# Altium PCB Main.PcbDoc
Units mm, origin at the board's own origin, x right, y up, seen from the top; angles counter-clockwise.
Board outline 44.2 x 163.58 mm, 2 copper layers (Top Layer, Bottom Layer); 7 components, 42 nets, 146 pads, 51 vias.
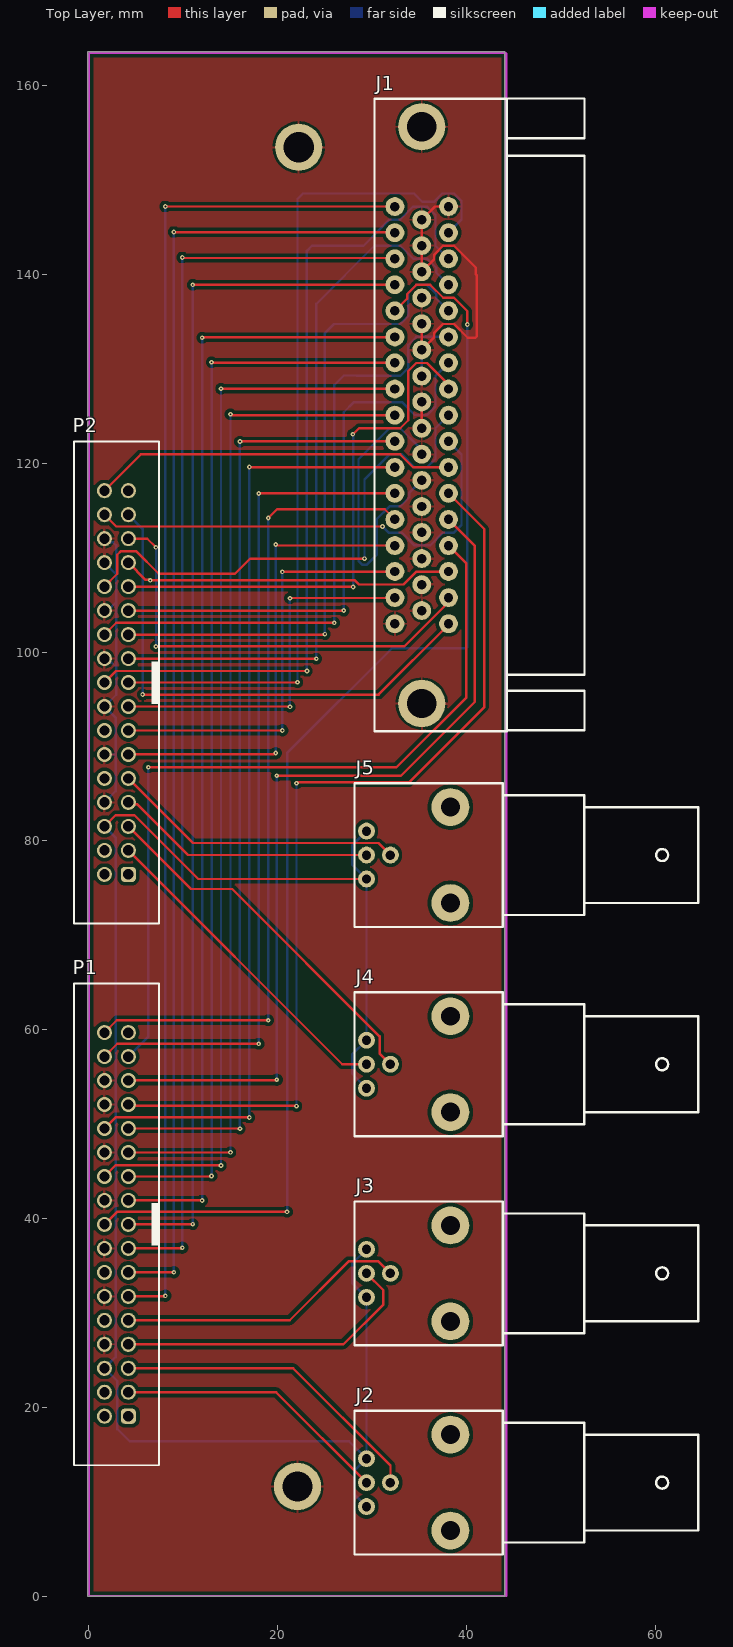
[diagram p0: Top Layer view]
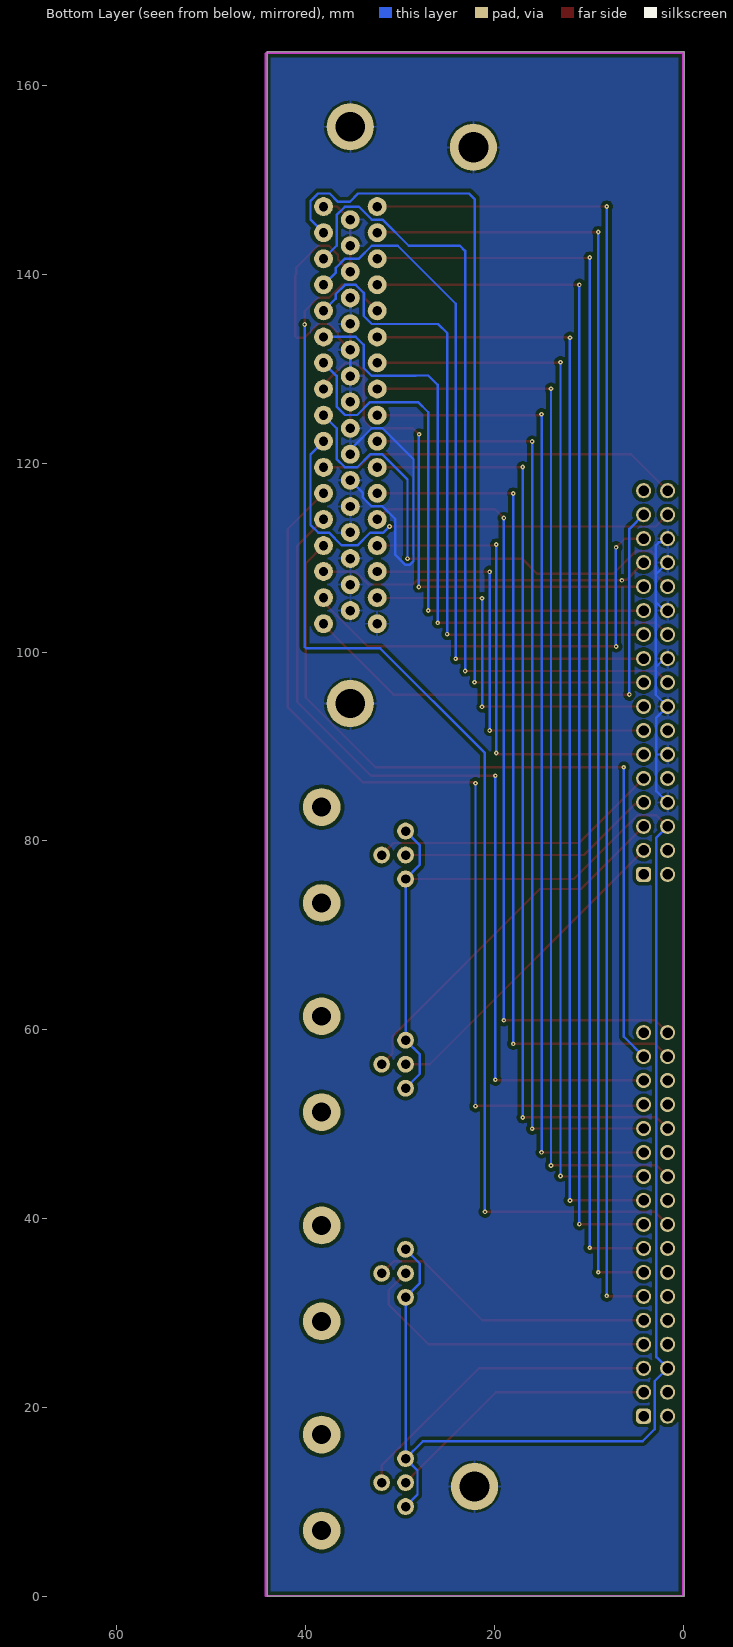
[diagram p1: Bottom Layer view, seen from below]

## Layer stack, top to bottom
Top Solder: solder mask 0.0102, Solder Resist, Dk 3.5
Top Layer: signal copper 0.0356
Dielectric 1: dielectric 0.32, FR-4, Dk 4.8
Bottom Layer: signal copper 0.0356
Bottom Solder: solder mask 0.0102, Solder Resist, Dk 3.5

## Board outline
-0.127,0 44.069,0 44.069,163.576 -0.127,163.576

## Design rules (kind name [scope] priority, off if disabled: settings)
BoardOutlineClearance [not(IsText)] p1 off: gap=0.7 ignorepadtopadclearanceinfootprint=FALSE
Clearance "Polygon Clearance" [InPolygon] p1: gap=0.381 ignorepadtopadclearanceinfootprint=TRUE
Clearance [All] p2: gap=0.254 ignorepadtopadclearanceinfootprint=TRUE except(0: Arc-Hole Track-Hole SMDPad-Hole THPad-Hole Via-Hole Fill-Hole Poly-Hole Region-Hole Text-Hole)
Height [All] p1: minheight=0 maxheight=30.48 prefheight=12.7
PolygonConnect [All] p1: connectstyle=Relief reliefconductorwidth=0.254 reliefentries=4 polygonreliefangle="90 Angle" airgapwidth=0.254
RoutingVias RoutingVias_1 [InNetClass('HC')] p1: holewidth=0.4 width=0.7 viastyle="Through Hole" minholewidth=0.4 minwidth=0.7 maxholewidth=0.4 maxwidth=0.7
RoutingVias [All] p2: holewidth=0.2 width=0.5 viastyle="Through Hole" minholewidth=0.2 minwidth=0.5 maxholewidth=0.4 maxwidth=0.7
SolderMaskExpansion [All] p1: expansion=0.102 istentingtop=FALSE
Width [All] p1: maxlimit=5.08 minlimit=0.254 preferedwidth=0.254 toplayer_maxwidth=2.54 minimp=50.000000 maximp=50.000000 favimp=50.000000
29 further rules are at their usual default settings.

## Components (designator, comment, footprint, x,y, rotation, side; value= is the part's Value field where it differs from the comment)
J1 "163A18649X" "CON D STD 50Way Male RA" 35.26,125.1 r90 top
J2 "CON BNC Dual B" BNC_INS90_Dual 31.95,12.02 r180 top
J3 "CON BNC Dual B" BNC_INS90_Dual 31.95,34.18 r180 top
J4 "CON BNC Dual B" BNC_INS90_Dual 31.95,56.34 r180 top
J5 "CON BNC Dual B" BNC_INS90_Dual 31.95,78.5 r180 top
P1 "61203421621" 61203421621 2.921,39.37 r90 top
P2 "61203421621" 61203421621 2.921,96.774 r90 top

## Footprints (in the part's own frame and the unit in brackets; to place one, negate y for a bottom-side part, rotate by r counter-clockwise, add the part's x,y. Pads: shape width x height; smd on the part's side, far side on the other; paste and mask are expansions set on the pad)
61203421621 [mm] "34 pins, straight, gold plating"
  rrect50% 1.6x1.6 hole 1.1: 1(-20.32,-1.27)
  round 1.6 hole 1.1: 2(-20.32,1.27) 3(-17.78,-1.27) 4(-17.78,1.27) 5(-15.24,-1.27) 6(-15.24,1.27) 7(-12.7,-1.27) 8(-12.7,1.27) 9(-10.16,-1.27) 10(-10.16,1.27) 11(-7.62,-1.27) 12(-7.62,1.27) 13(-5.08,-1.27) 14(-5.08,1.27) 15(-2.54,-1.27) 16(-2.54,1.27) 17(0,-1.27) 18(0,1.27) 19(2.54,-1.27) 20(2.54,1.27) 21(5.08,-1.27) 22(5.08,1.27) 23(7.62,-1.27) 24(7.62,1.27) 25(10.16,-1.27) 26(10.16,1.27) 27(12.7,-1.27) 28(12.7,1.27) 29(15.24,-1.27) 30(15.24,1.27) 31(17.78,-1.27) 32(17.78,1.27) 33(20.32,-1.27) 34(20.32,1.27)
  silkscreen extent -25.52,-4.5 25.52,4.5, body extent -25.42,-4.42 25.42,4.75, height 9.13
BNC_INS90_Dual [mm] "Dual BNC Amphenol 031-6575"
  round 1.778 hole 1: 1(0,0) 2(2.54,2.54) 3(2.54,0) 4(2.54,-2.54)
  round 4 hole 2: ""(-6.35,5.08) ""(-6.35,-5.08)
  silkscreen extent -32.59,-7.62 3.81,7.62
"CON D STD 50Way Male RA" [mm] "50 Way Male D Sub RA PCB"
  round 5 hole 3.1: 0(-30.55,0) 0(30.55,0)
  round 2 hole 1: 1(-22.1,2.84) 2(-19.33,2.84) 3(-16.56,2.84) 4(-13.82,2.84) 5(-11.05,2.84) 6(-8.28,2.84) 7(-5.54,2.84) 8(-2.77,2.84) 9(0,2.84) 10(2.77,2.84) 11(5.54,2.84) 12(8.28,2.84) 13(11.05,2.84) 14(13.82,2.84) 15(16.56,2.84) 16(19.33,2.84) 17(22.1,2.84) 18(-20.7,0) 19(-17.96,0) 20(-15.19,0) 21(-12.42,0) 22(-9.68,0) 23(-6.91,0) 24(-4.14,0) 25(-1.4,0) 26(1.4,0) 27(4.14,0) 28(6.91,0) 29(9.68,0) 30(12.42,0) 31(15.19,0) 32(17.96,0) 33(20.7,0) 34(-22.1,-2.84) 35(-19.33,-2.84) 36(-16.56,-2.84) 37(-13.82,-2.84) 38(-11.05,-2.84) 39(-8.28,-2.84) 40(-5.54,-2.84) 41(-2.77,-2.84) 42(0,-2.84) 43(2.77,-2.84) 44(5.54,-2.84) 45(8.28,-2.84) 46(11.05,-2.84) 47(13.82,-2.84) 48(16.56,-2.84) 49(19.33,-2.84) 50(22.1,-2.84)
  silkscreen extent -33.5,-17.25 33.55,5, body extent -33.5,-17.33 33.5,4.97, height 15.2

## Part data
J1: library part "CON DSUB50 RA Male", "50 Position D-Sub Plug, Male Pins Connector", Digi-Key=626-2184-ND, Manufacturer Part Number=163A18649X, Orientation="Right Angle", Positions=50
J2 J3 J4 J5: "BNC Dual - Black", Manufacturer=Amphenol, Manufacturer Code=031-6575, Digikey Order=ARF2111-ND
P1 P2: library part CMP-1502-00013-2, Color=Black, Contact Resistance=20mΩ, Current Rating=3A, Insulation Resistance=1GΩ, Max Operating Temperature=105°C, Min Operating Temperature=-40°C, Operating Supply Voltage=250V, Connector Type="Male Pin", Contact Material=Copper, Contact Plating=Gold, Gender=Male, Insulation Material=PBT, Lead Free="Lead Free", Lead Pitch=2.54mm, Length=50.84mm, Mount="Through Hole", NexarPartId=32855483, Number of contacts=34, Number of Pins=34, Number of Positions=34, Number Of Rows=2, Orientation=Vertical, Pitch=2.54mm, REACH SVHC=Unknown, RoHS=Compliant, Row Spacing=2.54mm, Termination=Solder

## Free pads (board coordinates)
  round 5 hole 3.2: 1(22.227,153.473) 2(22.1,11.6)

## Via types
v1: diameter 0.5, hole 0.2, Top Layer to Bottom Layer, 51 vias

## Nets (pads, with @x,y where several pads share a name; then routed paths per layer and width w, separated by ;. In a path a pad name is that pad's centre, name@x,y a point inside that pad or via, vN(x,y) a via of type N, cw(c..) or ccw(c..) an arc to the next point about the centre after c; other vN are vias at no path point)
AGND: J2.2 J2.4 J3.2 J3.4 J4.2 J4.4 J5.2 J5.4 P1.6 P2.6 | length 183.4
  Top Layer w0.254: P2.6 2.832,82.715 4.832,82.715 11.587,75.96 J5.2
  Bottom Layer w0.254: P2.6 2.832,80.353 2.832,25.311 P1.6 3.01,22.771 3.01,17.69 4.3,16.4 27.57,16.4 J2.4 ; J2.2 28.14,10.75 28.14,13.29 J2.4 ; J3.4 27.886,35.196 27.886,33.164 J3.2 J2.4 ; J4.2 27.886,55.324 27.886,57.356 J4.4 J5.2 27.886,77.484 27.886,79.516 J5.4
AI1: J2.3 P1.3 | length 29.2
  Top Layer w0.254: P1.3 19.84,21.59 J2.3
AI2: J2.1 P1.5 | length 33.8
  Top Layer w0.254: P1.5 21.636,24.13 31.95,13.816 J2.1
AI3: J3.3 P1.7 | length 32.8
  Top Layer w0.254: P1.7 26.97,26.67 31.2,30.9 31.2,32.39 J3.3
AI4: J3.1 P1.9 | length 30.9
  Top Layer w0.254: P1.9 21.283,29.21 27.523,35.45 30.68,35.45 J3.1
AI5: J4.3 P2.3 | length 34.6
  Top Layer w0.254: P2.3 26.845,56.34 J4.3
AI6: J4.1 P2.5 | length 39.2
  Top Layer w0.254: P2.5 10.825,74.9 15.186,74.9 30.797,59.289 30.797,57.493 J4.1
AI7: J5.3 P2.7 | length 27.5
  Top Layer w0.254: P2.7 4.405,83.86 5.14,83.86 10.5,78.5 J5.3
AI8: J5.1 P2.9 | length 31.1
  Top Layer w0.254: P2.9 11.035,79.77 30.68,79.77 J5.1
DIO1: J1.17 P1.11 | length 143.6
  Top Layer w0.254: P1.11 8.05,31.75 v1(8.1,31.8) ; v1(8.1,147.2) J1.17
  Bottom Layer w0.254: v1(8.1,31.8) v1(8.1,147.2)
DIO2: J1.16 P1.13 | length 138.5
  Top Layer w0.254: P1.13 8.89,34.29 8.9,34.3 v1(9,34.3) ; v1(9,144.5) 9.035,144.465 32.385,144.465 J1.16
  Bottom Layer w0.254: v1(9,34.3) v1(9,144.5)
DIO3: J1.15 P1.15 | length 133.2
  Top Layer w0.254: P1.15 9.83,36.83 v1(9.9,36.9) ; v1(9.9,141.8) 9.947,141.753 32.327,141.753 J1.15
  Bottom Layer w0.254: v1(9.9,36.9) v1(9.9,141.8)
DIO4: J1.14 P1.17 | length 127.7
  Top Layer w0.254: P1.17 10.97,39.37 v1(11,39.4) ; v1(11,138.9) 11.01,138.91 32.41,138.91 J1.14
  Bottom Layer w0.254: v1(11,39.4) v1(11,138.9)
DIO5: J1.13 P1.18 | length 138.1
  Top Layer w0.254: P1.18 2.981,40.7 v1(21,40.7) ; J1.13 33.721,137.451 33.721,137.934 34.688,138.901 36.166,138.901 37.536,137.531 38.672,137.531 40.1,136.103 v1(40.1,134.7)
  Bottom Layer w0.254: v1(21,40.7) 21,89.3 32.1,100.4 39.951,100.4 40.1,100.549 v1(40.1,134.7)
DIO6: J1.12 P1.19 | length 119.7
  Top Layer w0.254: P1.19 11.99,41.91 v1(12,41.9) ; v1(12,133.3) 12.04,133.34 32.38,133.34 J1.12
  Bottom Layer w0.254: v1(12,41.9) v1(12,133.3)
DIO7: J1.11 P1.21 | length 114.5
  Top Layer w0.254: P1.21 12.95,44.45 v1(13,44.5) ; v1(13,130.7) 13.03,130.67 32.39,130.67 J1.11
  Bottom Layer w0.254: v1(13,44.5) v1(13,130.7)
DIO8: J1.10 P1.22 | length 113.6
  Top Layer w0.254: P1.22 2.832,45.631 13.969,45.631 v1(14,45.6) ; v1(14,127.9) 14.015,127.885 32.405,127.885 J1.10
  Bottom Layer w0.254: v1(14,45.6) v1(14,127.9)
DIO9: J1.9 P1.23 | length 106.5
  Top Layer w0.254: P1.23 14.99,46.99 v1(15,47) ; v1(15,125.2) 15.067,125.2 15.167,125.1 J1.9
  Bottom Layer w0.254: v1(15,47) v1(15,125.2)
DIO10: J1.8 P1.25 | length 101.1
  Top Layer w0.254: P1.25 15.97,49.53 v1(16,49.5) ; v1(16,122.3) 16.015,122.315 32.405,122.315 J1.8
  Bottom Layer w0.254: v1(16,49.5) v1(16,122.3)
DIO11: J1.7 P1.26 | length 100.2
  Top Layer w0.254: P1.26 2.832,50.711 16.989,50.711 v1(17,50.7) ; v1(17,119.6) 17.02,119.58 32.4,119.58 J1.7
  Bottom Layer w0.254: v1(17,50.7) v1(17,119.6)
DIO12: J1.6 P1.32 | length 89.6
  Top Layer w0.254: P1.32 3.001,58.5 v1(18,58.5) ; v1(18,116.8) 18.01,116.81 32.41,116.81 J1.6
  Bottom Layer w0.254: v1(18,58.5) v1(18,116.8)
DIO13: J1.5 P1.34 | length 85.3
  Top Layer w0.254: P1.34 2.961,61 v1(19,61) ; v1(19,114.2) 19.931,115.131 31.339,115.131 J1.5
  Bottom Layer w0.254: v1(19,61) v1(19,114.2)
DIO14: J1.4 P2.11 | length 50.4
  Top Layer w0.254: P2.11 4.214,89.177 19.61,89.177 19.733,89.3 v1(19.8,89.3) ; v1(19.8,111.4) 19.867,111.4 19.977,111.29 32.41,111.29 J1.4
  Bottom Layer w0.254: v1(19.8,89.3) v1(19.8,111.4)
DIO15: J1.3 P2.13 | length 45
  Top Layer w0.254: P2.13 20.494,91.694 v1(20.5,91.7) ; v1(20.5,108.5) 20.52,108.52 32.4,108.52 J1.3
  Bottom Layer w0.254: v1(20.5,91.7) v1(20.5,108.5)
DIO16: J1.2 P2.15 | length 39.8
  Top Layer w0.254: P2.15 21.266,94.234 v1(21.3,94.2) ; v1(21.3,105.7) 21.335,105.735 32.385,105.735 J1.2
  Bottom Layer w0.254: v1(21.3,94.2) v1(21.3,105.7)
DIO17: J1.49 P2.17 | length 91.7
  Top Layer w0.254: P2.17 22.074,96.774 v1(22.1,96.8)
  Bottom Layer w0.254: v1(22.1,96.8) 22.1,148 22.681,148.581 34.432,148.581 35.324,147.689 36.552,147.689 37.444,148.581 38.672,148.581 39.481,147.772 39.481,145.811 J1.49
DIO18: J1.48 P2.18 | length 87.6
  Top Layer w0.254: P2.18 2.877,98 v1(23.1,98)
  Bottom Layer w0.254: v1(23.1,98) 23.1,142.5 23.641,143.041 29.078,143.041 31.848,145.811 32.984,145.811 34.354,147.181 35.832,147.181 36.719,146.294 36.719,143.041 J1.48
DIO19: J1.47 P2.19 | length 76
  Top Layer w0.254: P2.19 24.086,99.314 v1(24.1,99.3)
  Bottom Layer w0.254: v1(24.1,99.3) 24.1,136.9 30.241,143.041 32.992,143.041 34.354,141.679 35.824,141.679 36.795,140.708 36.795,140.225 J1.47
DIO20: J1.46 P2.21 | length 70.8
  Top Layer w0.254: P2.21 24.954,101.854 v1(25,101.9)
  Bottom Layer w0.254: v1(25,101.9) 25,133.8 25.961,134.761 32.984,134.761 33.836,135.613 33.836,138.049 34.688,138.901 35.832,138.901 36.799,137.934 36.799,137.451 J1.46
DIO21: J1.45 P2.22 | length 65.7
  Top Layer w0.254: P2.22 2.897,103.1 v1(26,103.1)
  Bottom Layer w0.254: v1(26,103.1) 26,128.3 27,129.3 28.3,129.3 28.341,129.259 32.992,129.259 33.84,130.107 33.84,132.543 34.688,133.391 38.089,133.391 J1.45
DIO22: J1.44 P2.23 | length 60.1
  Top Layer w0.254: P2.23 26.994,104.394 v1(27,104.4)
  Bottom Layer w0.254: v1(27,104.4) 27,125.4 28.081,126.481 33.159,126.481 34.521,125.119 35.832,125.119 36.719,126.006 36.719,129.259 J1.44
DIO23: J1.43 P2.25 | length 57.7
  Top Layer w0.254: P2.25 27.966,106.934 v1(28,106.9) ; v1(27.97,123.073) 28.616,123.719 32.992,123.719 33.84,124.567 33.84,129.773 34.688,130.621 35.832,130.621 37.619,128.834 37.619,128.823 38.1,128.342 J1.43
  Bottom Layer w0.254: v1(27.97,123.073) 28,123.043 v1(28,106.9)
DIO24: J1.42 P2.26 | length 55.1
  Top Layer w0.254: P2.26 3.01,108.293 3.01,110.31 3.4,110.7 4.993,110.7 7.4,108.293 15.484,108.293 17.091,109.9 v1(29.2,109.9)
  Bottom Layer w0.254: v1(29.2,109.9) 29.2,118.293 31.848,120.941 33.159,120.941 34.521,119.579 35.832,119.579 36.719,120.466 36.719,123.719 J1.42
DIO25: J1.41 P2.32 | length 49.5
  Top Layer w0.254: P2.32 2.905,113.3 v1(31.116,113.3)
  Bottom Layer w0.254: v1(31.116,113.3) 31.755,112.661 33.146,112.661 34.508,111.299 36.166,111.299 37.528,112.661 38.664,112.661 39.481,113.478 39.481,120.949 J1.41
DIO26: J1.40 P2.34 | length 38.6
  Top Layer w0.254: P2.34 5.498,120.941 32.992,120.941 34.362,119.571 38.089,119.571 J1.40
GND: J1.0 J1.1 J1.18 J1.19 J1.20 J1.21 J1.22 J1.23 J1.24 J1.25 J1.26 J1.27 J1.28 J1.29 J1.30 J1.31 J1.32 J1.33 J1.50 P1.8 P1.12 P1.16 P1.20 P1.24 P1.28 P1.30 P2.8 P2.12 P2.16 P2.20 P2.24 P2.28 P2.30 pad.1 pad.2 | length 110.4
  Top Layer w0.254: J1.25 J1.26 ; J1.29 J1.28 36.561,133.311 36.561,133.794 37.528,134.761 38.672,134.761 40.133,133.3 40.951,133.3 41.1,133.449 41.1,139.9 41,140 41,140.713 38.672,143.041 37.528,143.041 36.561,142.074 36.561,141.591 J1.31 J1.32 J1.33 36.66,147.2 J1.50
  Bottom Layer w0.254: P2.8 2.832,85.255 2.832,89.154 ; P2.12 2.832,89.154 ; P2.20 1.986,99.314 2.9,98.4 ; P2.24 1.994,104.394 2.9,105.3 ; P2.28 2.9,108.225 ; P2.30 2.015,112.014 2.411,111.619 2.581,111.619 2.9,111.3 2.9,108.225 ; J1.23 33.959,116.889 33.959,116.406 32.984,115.431 31.848,115.431 30.485,114.068 30.485,110.293 29.461,109.269 28.939,109.269 28.569,109.639 28.569,120.432 31.848,123.711 32.992,123.711 34.926,121.777 34.926,121.294 J1.24 ; J1.27 J1.28 ; 2.832,89.154 2.832,93.053 P2.16 2.9,95.483 2.9,98.4 ; 2.9,98.4 2.9,105.3 ; 2.9,105.3 2.9,108.225
PWM1: J1.38 P1.29 | length 92.7
  Top Layer w0.254: P1.29 4.236,54.655 19.855,54.655 v1(19.9,54.7) ; v1(19.9,86.9) 33.063,86.9 40.9,94.737 40.9,111.25 J1.38
  Bottom Layer w0.254: v1(19.9,54.7) v1(19.9,86.9)
PWM2: J1.37 P1.31 | length 85.1
  Top Layer w0.254: v1(6.3,87.8) 32.584,87.8 39.989,95.205 39.989,109.391 J1.37
  Bottom Layer w0.254: P1.31 6.3,59.259 v1(6.3,87.8)
PWM3: J1.36 P2.27 | length 35.4
  Top Layer w0.254: P2.27 6.018,107.647 6.453,107.647 v1(6.5,107.6) 28.192,107.6 28.633,107.159 33.326,107.159 34.696,108.529 38.089,108.529 J1.36
PWM4: J1.35 P2.29 | length 47.2
  Top Layer w0.254: P2.29 6.186,112.014 v1(7.1,111.1) ; v1(7.1,100.6) 33.413,100.6 37.619,104.806 37.619,104.817 38.1,105.298 J1.35
  Bottom Layer w0.254: v1(7.1,100.6) 7.131,100.631 7.131,111.069 v1(7.1,111.1)
PWM5: J1.34 P2.31 | length 55.3
  Top Layer w0.254: v1(5.7,95.5) 30.7,95.5 38.1,102.9 J1.34
  Bottom Layer w0.254: P2.31 5.7,113.045 v1(5.7,95.5) ; J1.34@38.1,102.95 J1.34
PWMM: J1.39 P1.27 | length 99.5
  Top Layer w0.254: P1.27 4.314,51.947 21.953,51.947 v1(22,51.9) ; v1(22,86.1) 22.1,86.2 33.9,86.2 41.9,94.2 41.9,113.02 J1.39
  Bottom Layer w0.254: v1(22,51.9) v1(22,86.1)
pads on no net: J2. J3. J4. J5. P1.1 P1.2 P1.4 P1.10 P1.14 P1.33 P2.1 P2.2 P2.4 P2.10 P2.14 P2.33

## Polygon pours and split planes (outlines as drawn)
GND on Top Layer "GND_L01_P000" (solid, remove dead copper, pour order 0): 0,163.6 44.2,163.6 44.2,0 0,0 0,163.5
GND on Bottom Layer "GND_L02_P001" (solid, remove dead copper, pour order 1): 0,163.6 44.2,163.6 44.2,0 0,0 0,163.5

## Keep-outs
Keep-Out Layer:
  lines w0.254: 0,0 0,163.5 44.1,163.5 44.2,163.4 44.2,0 0,0

## Text inside footprints (layer, text, board x,y; h text height)
J1: Mechanical 1 "BOARD EDGE" at 43.744,149.1 h1.52 r90
J2: Top Overlay "7mm & 23mm up" at 85.95,14.52 h1.52 r180; Top Overlay "12.7mm Dia" at 83.95,11.52 h1.52 r180
J3: Top Overlay "7mm & 23mm up" at 85.95,36.68 h1.52 r180; Top Overlay "12.7mm Dia" at 83.95,33.68 h1.52 r180
J4: Top Overlay "7mm & 23mm up" at 85.95,58.84 h1.52 r180; Top Overlay "12.7mm Dia" at 83.95,55.84 h1.52 r180
J5: Top Overlay "7mm & 23mm up" at 85.95,81 h1.52 r180; Top Overlay "12.7mm Dia" at 83.95,78 h1.52 r180